# Altium PCB mag-encoder-v2.PcbDoc
Units mm, origin at the board's own origin, x right, y up, seen from the top; angles counter-clockwise.
Board outline 66.2 x 50.7 mm, 3 copper layers (Component Side, Mid-Layer 1, Bottom Layer), stack 1.937 mm thick; 34 components, 28 nets, 182 pads, 32 vias.
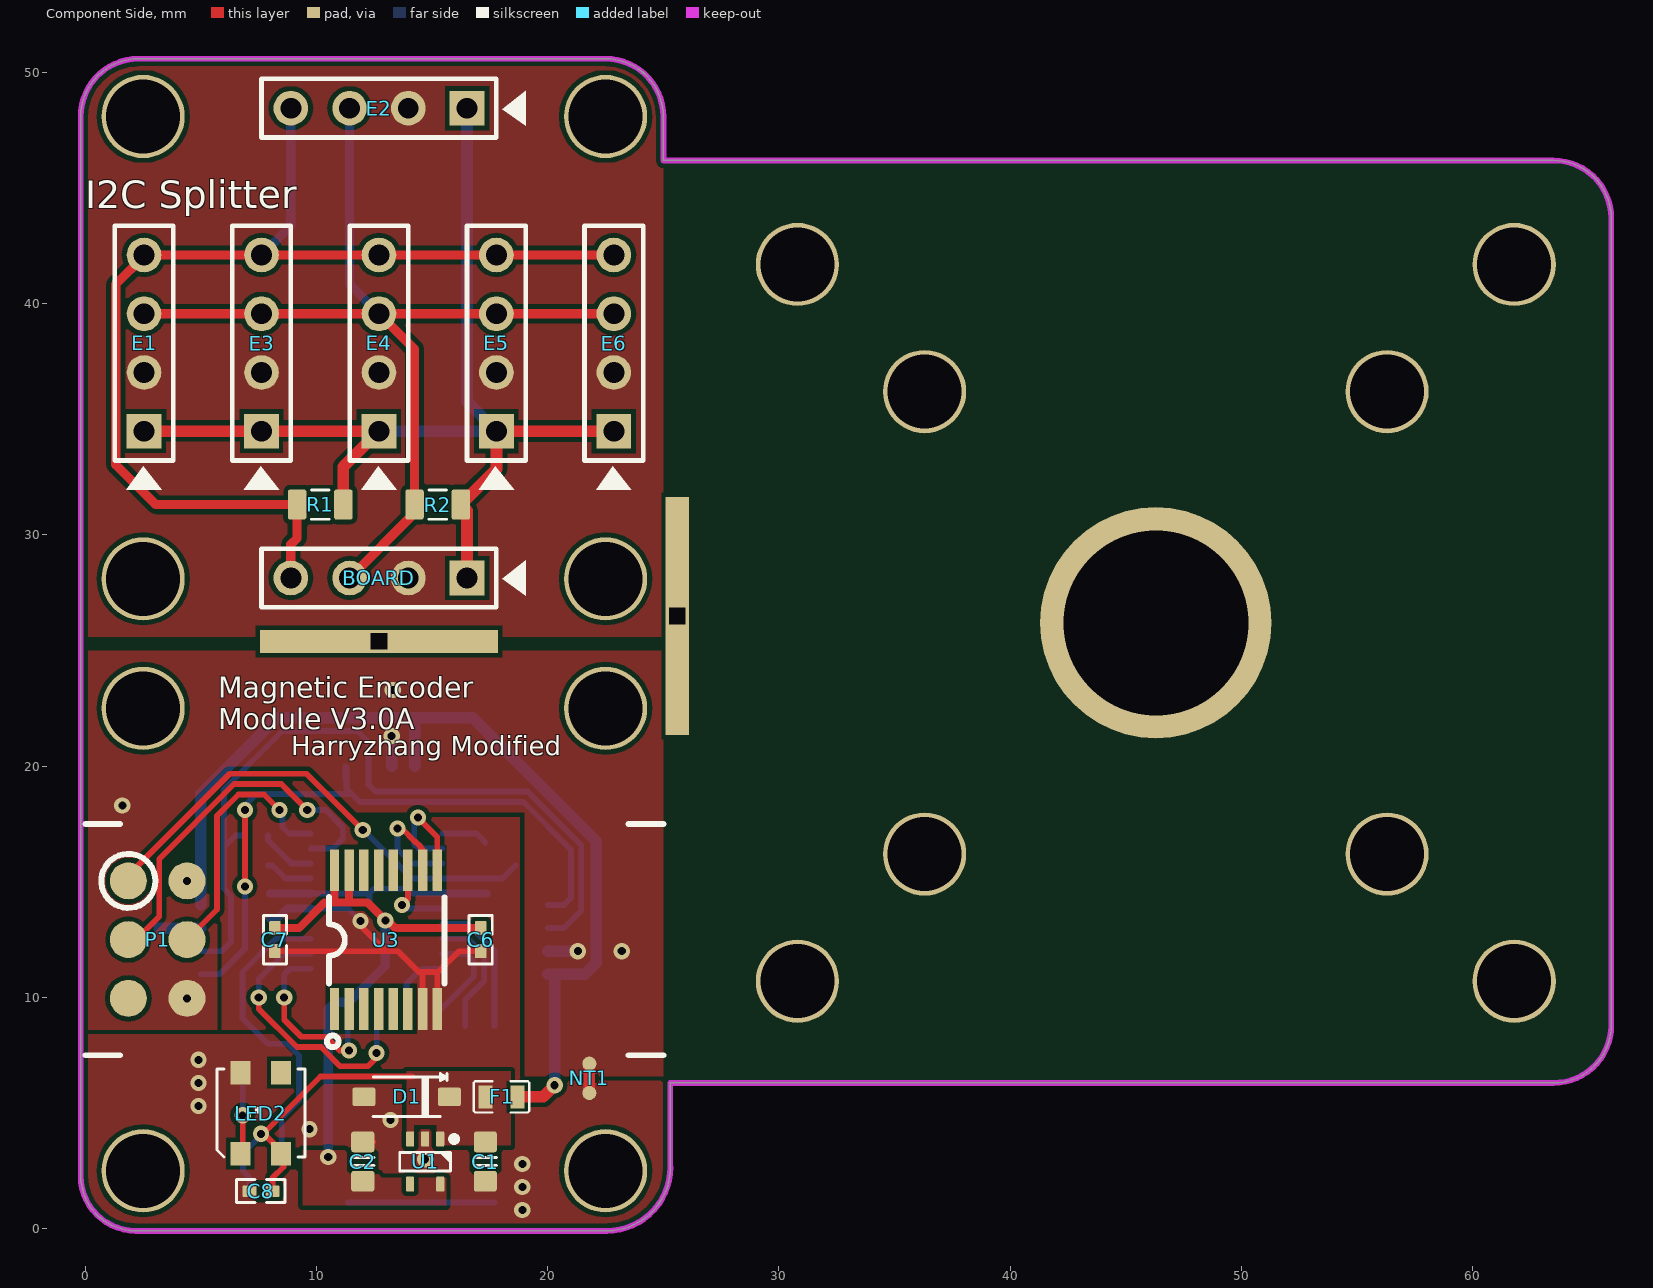
[diagram p0: Component Side view]
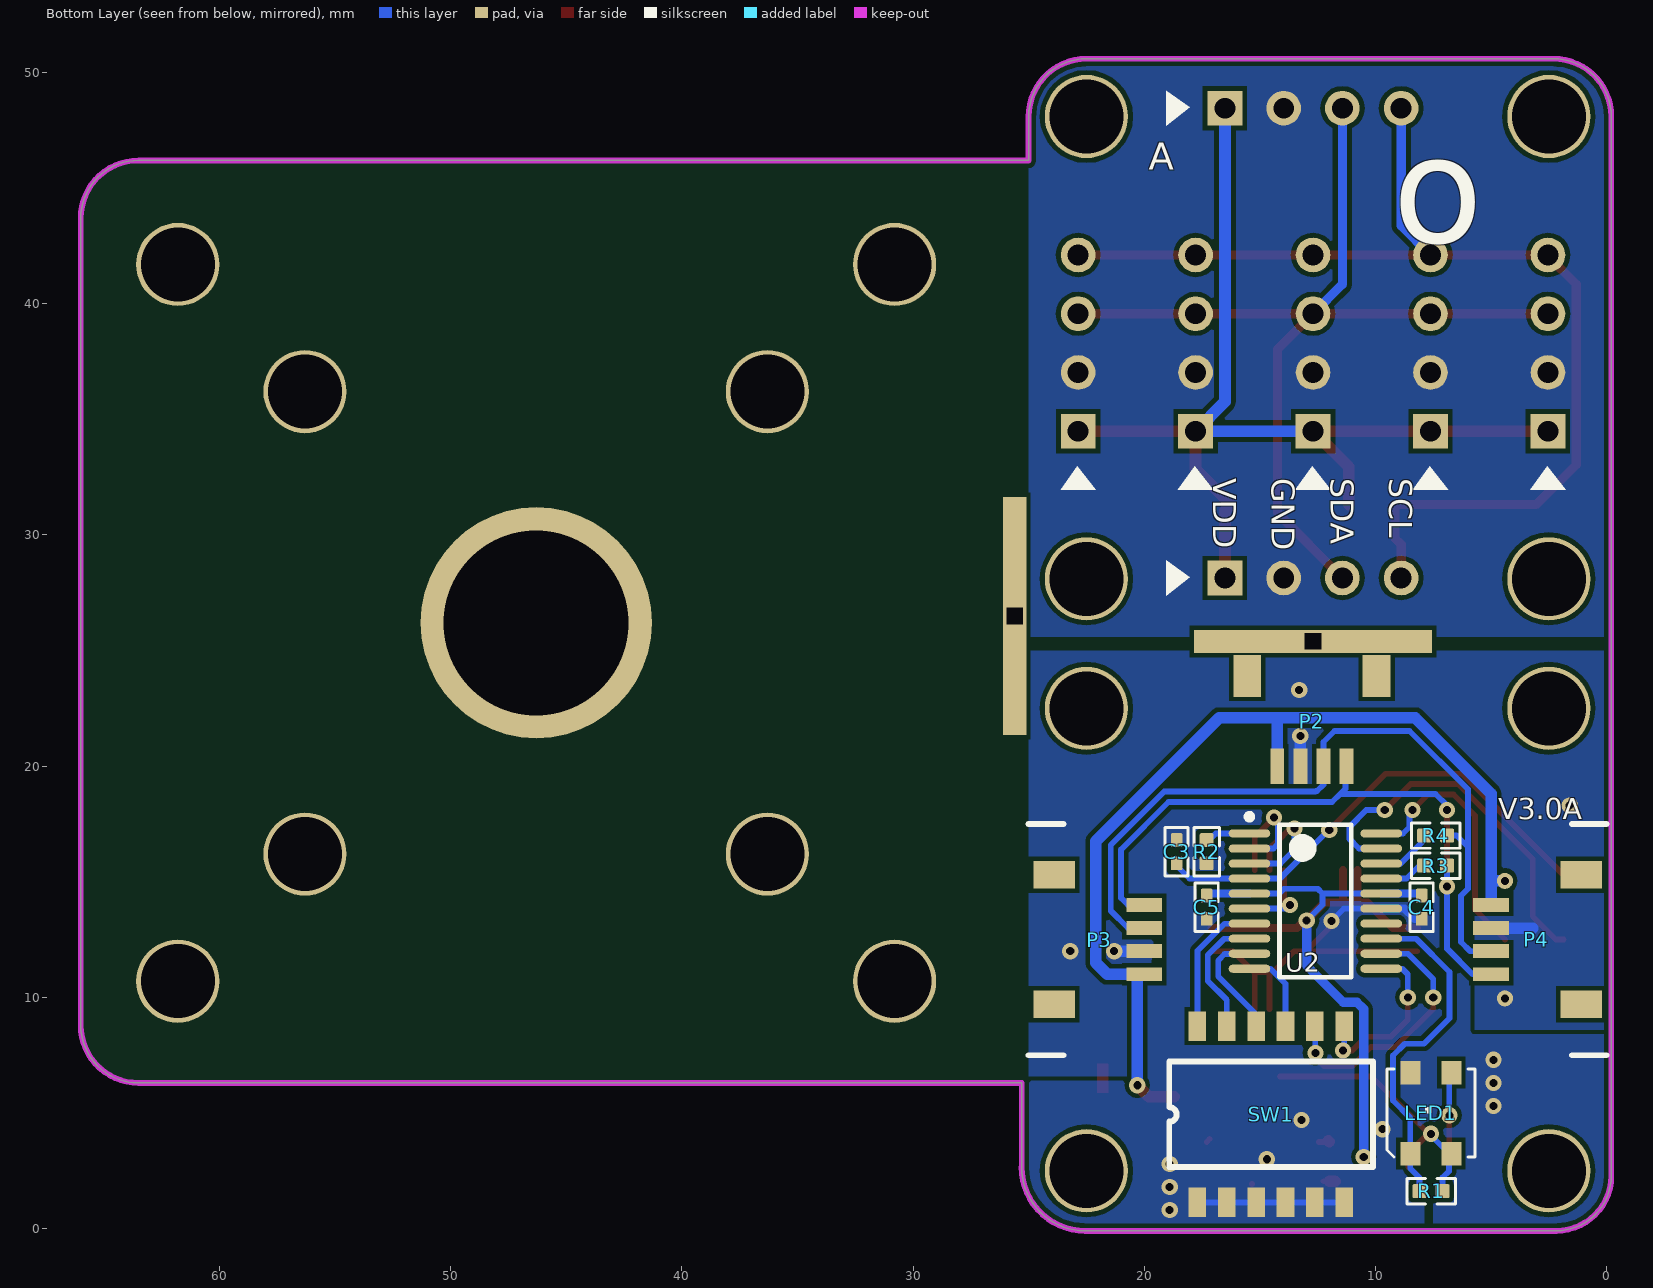
[diagram p1: Bottom Layer view, seen from below]
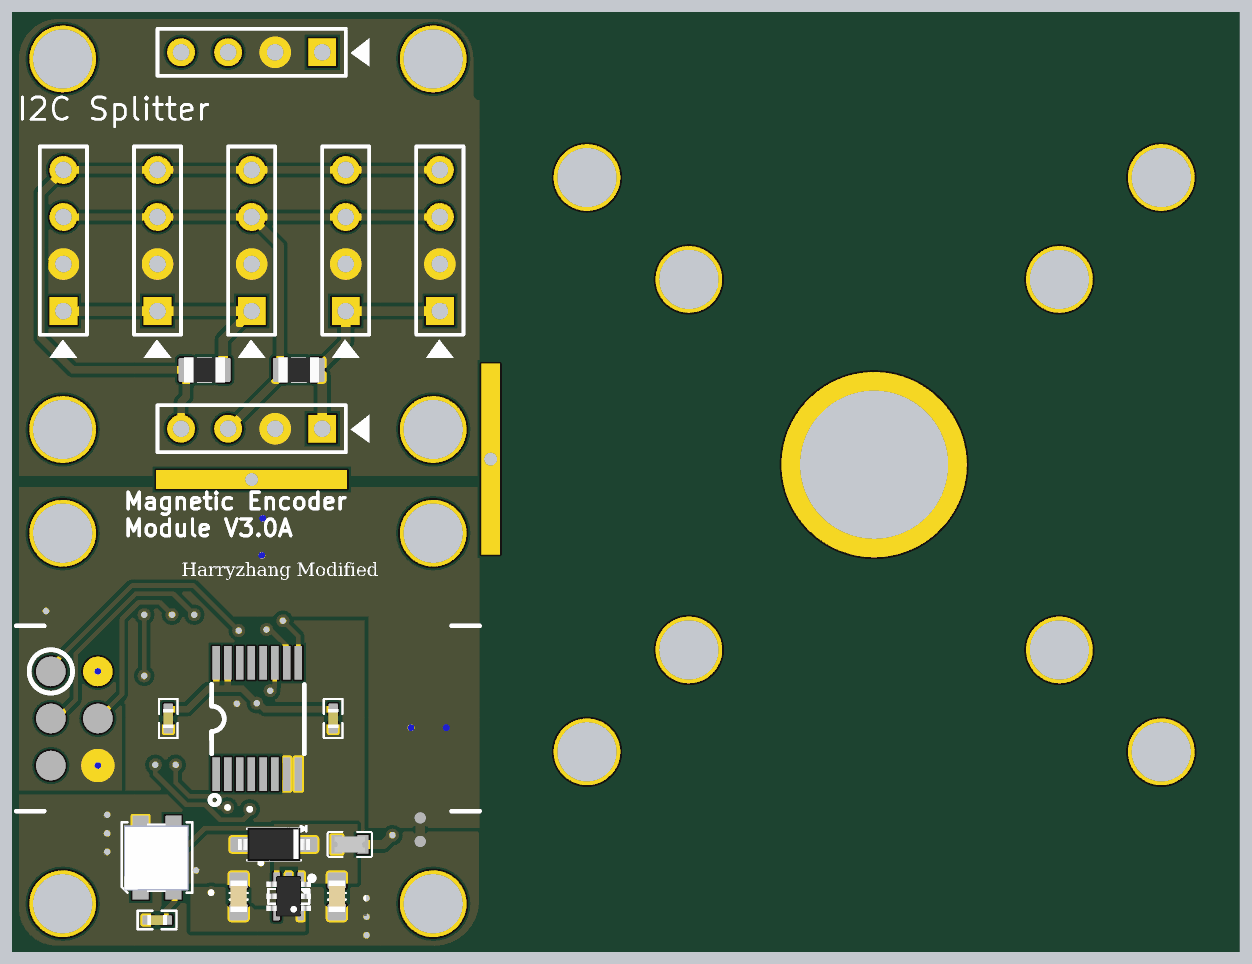
[diagram p2: 3D render of the assembled board from above, using the file's embedded part models]
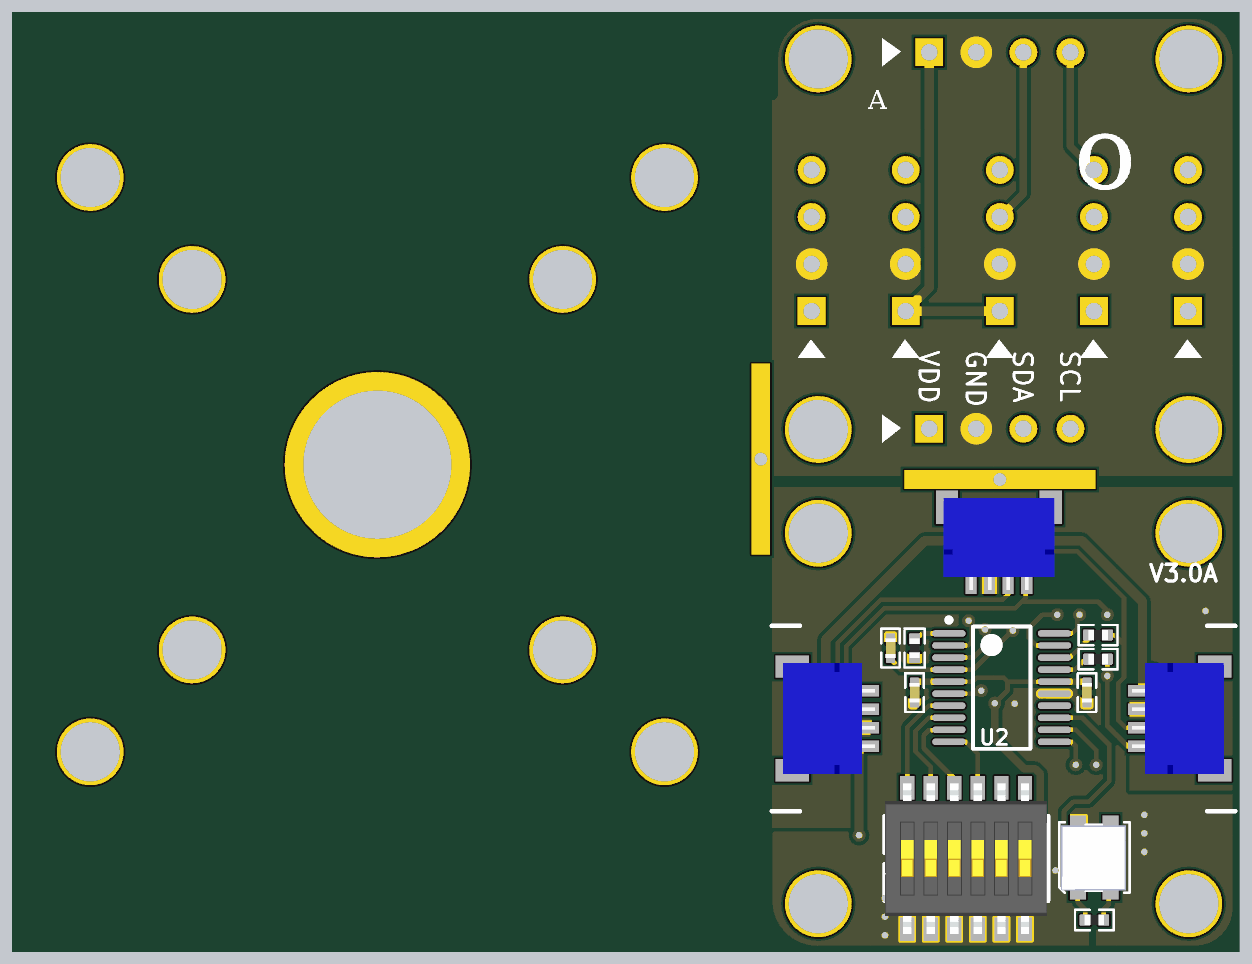
[diagram p3: 3D render of the assembled board from below, using the file's embedded part models]

## Layer stack, top to bottom
Top Solder: solder mask 0.0102, Solder Resist, Dk 3.5
Component Side: signal copper 0.0356
Dielectric 1: core 1.51, FR-4, Dk 4.2
Mid-Layer 1: signal copper 0.0356
Dielectric2: dielectric 0.32, FR-4, Dk 4.8
Bottom Layer: signal copper 0.0356
Solder Side: solder mask 0.0102, Solder Resist, Dk 3.5

## Board outline
-0.2,2.282 ccw(c2.173,2.282) 2.173,-0.091 2.173,-0.1 22.549,-0.1 ccw(c22.549,2.657) 25.306,2.657 25.3,2.663 25.3,6.3 63.5,6.3 ccw(c63.5,8.8) 66,8.8 66,43.7 ccw(c63.5,43.7) 63.5,46.2 25,46.2 25,48.1 ccw(c22.5,48.1) 22.5,50.6 2.3,50.6 ccw(c2.3,48.1) -0.2,48.1

## Design rules (kind name [scope] priority, off if disabled: settings)
Clearance [All] p1: gap=0.2 ignorepadtopadclearanceinfootprint=FALSE except(0: Arc-Hole Track-Hole SMDPad-Hole THPad-Hole Via-Hole Fill-Hole Poly-Hole Region-Hole Text-Hole)
FabricationTestPointUsage TestPointUsage [All] p1: valid=0 allowmultiple=FALSE
FabricationTestpoint Testpoint [All] p1: side=3 testpointundercomponent=TRUE minsize=1.016 maxsize=2.54 preferedsize=1.524 minholesize=0 maxholesize=1.016 preferedholesize=0.813 testpointgrid=0.025 allowsidetop=TRUE allowsidebottom=TRUE usegrid=TRUE gridtolerance=0
HoleSize [All] p1: absolutevalues=TRUE maxlimit=3.5 minlimit=0.025 maxpercent=80.000 minpercent=20.000
PlaneConnect [IsVia] p1: planeconnectstyle=Direct reliefexpansion=0.508 reliefentries=4 reliefconductorwidth=0.254 reliefairgap=0.254
PlaneConnect PlaneConnect_1 [All] p2: planeconnectstyle=Relief reliefexpansion=0.508 reliefentries=4 reliefconductorwidth=0.254 reliefairgap=0.254
PolygonConnect PolygonConnect_1 [IsVia] p1: connectstyle=Direct reliefconductorwidth=0.254 reliefentries=4 polygonreliefangle="90 Angle" airgapwidth=0.254
PolygonConnect PolygonConnect_2 [HasFootprint('NETTIE_INTERNAL2_24MIL')] p2: connectstyle=Direct reliefconductorwidth=0.254 reliefentries=4 polygonreliefangle="90 Angle" airgapwidth=0.254
PolygonConnect [All] p3: connectstyle=Direct reliefconductorwidth=0.254 reliefentries=4 polygonreliefangle="90 Angle" airgapwidth=0.254
RoutingVias [All] p1: holewidth=0.35 width=0.7 viastyle="Through Hole" minholewidth=0.35 minwidth=0.7 maxholewidth=1 maxwidth=1.4
SilkToSolderMaskClearance SilkscreenOverComponentPads [IsPad] p1: minsilkscreentomaskgap=0.254 clearancetoexposedcopper=TRUE
SolderMaskExpansion [All] p1: expansion=0.102
Width [All] p1: maxlimit=1 minlimit=0.25 preferedwidth=0.25
25 further rules are at their usual default settings.

## Classes and differential pairs
component class splitterBoard: BOARD E1 E2 E3 E4 E5 E6 R1 R2
component class mag-encoder-v2: C1 C2 C3 C4 C5 C6 C7 C8 D1 F1 LED1 LED2 NT1 P1 P2 P3 P4 R1 R2 R3 R4 SW1 U1 U2 U3

## Components (designator, comment, footprint, x,y, rotation, side; value= is the part's Value field where it differs from the comment)
BOARD "Header 4" HDR1X4 16.51,28.14 r180 top
C1 "approved sub OK" CAPC1608X90N 17.3,2.9 r270 top value=4u7
C2 "approved sub OK" CAPC1608X90N 12,2.9 r90 top value=4u7
C3 "Approved sub OK" CAPC1005X55N 18.6,16.3 r90 bottom value=100n
C4 "Approved sub OK" CAPC1005X55N 8,13.9 r270 bottom value=100n
C5 "Approved sub OK" CAPC1005X55N 17.3,13.9 r270 bottom value=100n
C6 "Approved sub OK" CAPC1005X55N 17.1,12.5 r270 top value=100n
C7 "Approved sub OK" CAPC1005X55N 8.2,12.5 r270 top value=100n
C8 "Approved sub OK" CAPC1005X55N 7.595,1.62 r180 top value=100n
D1 "Approved sub OK" SOD123 13.9,5.7 r180 top value=5.6V
E1 "Header 4" HDR1X4 2.54,34.49 r90 top
E2 "Header 4" HDR1X4 16.51,48.46 r180 top
E3 "Header 4" HDR1X4 7.62,34.49 r90 top
E4 "Header 4" HDR1X4 12.7,34.49 r90 top
E5 "Header 4" HDR1X4 17.78,34.49 r90 top
E6 "Header 4" HDR1X4 22.86,34.49 r90 top
F1 "Approved sub OK" "PTC Fuse1608-0603" 18,5.7 r180 top value=250mA
LED1 "SK6812-Mini" SK6812 7.595,4.995 r270 bottom
LED2 "SK6812-Mini" SK6812 7.595,4.995 r270 top
NT1 "Net Tie" NETTIE_INTERNAL2_24MIL 21.8,6.5 r270 top net-tie
P1 "ISP" "ICSP Pads - SMD" 1.86,15.04 r0 top
P2 "JST-SH 4P" SM04B-SRSS-TB 14.25,20 r90 bottom locked
P3 "JST-SH 4P" SM04B-SRSS-TB 20,11 r0 bottom locked
P4 "JST-SH 4P" SM04B-SRSS-TB 5,14 r180 bottom locked
R1 "RES_EMPTY_0805" RESC2012X70N 10.16,31.315 r180 top value=N/A
R1 "Approved sub OK" RESC1005X40N 7.595,1.62 r0 bottom value=2K2
R2 "RES_EMPTY_0805" RESC2012X70N 15.24,31.315 r180 top value=N/A
R2 "Approved sub OK" RESC1005X40N 17.3,16.3 r270 bottom value=2K2
R3 "Approved sub OK" RESC1005X40N 7.4,15.7 r0 bottom value=330R
R4 "Approved sub OK" RESC1005X40N 7.4,17 r0 bottom value=330R
SW1 "Approved sub OK" "DIPSW SMD 6 Way" 17.7,1.135 r270 bottom locked
U1 "MIC5365-3.3YC5" SC70-5 14.7,2.9 r270 top
U2 "STM32F030F4P6" STM-TSSOP20_N 12.6,14.165 r180 bottom locked
U3 "AMS AS-5040" SSOP-16_L4.9-W3.9-P0.64-LS6.0-BL 13,12.5 r0 top locked

## Footprints (in the part's own frame and the unit in brackets; to place one, negate y for a bottom-side part, rotate by r counter-clockwise, add the part's x,y. Pads: shape width x height; smd on the part's side, far side on the other; paste and mask are expansions set on the pad)
CAPC1005X55N [mm] "Chip Capacitor, Body 1.0x0.5mm, EIA 0402, IPC Medium Density"
  round 0.2 on Mech15: 0(0,0)
  rrect20% 0.6x0.5 smd: 1(-0.5,0) 2(0.5,0)
  Component Side pour cut-out: -0.325,0.375 -0.2,0.5 0.2,0.5 0.325,0.375 0.325,-0.375 0.2,-0.5 -0.2,-0.5 -0.325,-0.375
  silkscreen extent -1.05,-0.5 1.05,0.5, body extent -0.52,-0.27 0.53,0.28, height 0.55
CAPC1608X90N [mm] "Chip Capacitor, Body 1.6x0.8mm, EIA 0603, IPC Medium Density"
  round 0.254 on Mech15: 0(0,0)
  rrect25% 0.9x1 smd: 1(-0.85,0) 2(0.85,0)
  Component Side pour cut-out: -0.6,0.5 -0.4,0.7 0.4,0.7 0.6,0.5 0.6,-0.5 0.4,-0.7 -0.4,-0.7 -0.6,-0.5
  silkscreen extent -0.18,-0.48 0.18,0.48, body extent -0.85,-0.45 0.85,0.45, height 0.89
"DIPSW SMD 6 Way" [mil]
  rect 50x30 smd: 1(0,0) 2(0,50) 3(0,100) 4(0,150) 5(0,200) 6(0,250) 7(-300,250) 8(-300,200) 9(-300,150) 10(-300,100) 11(-300,50) 12(-300,0)
  silkscreen extent -240,-48 -60,299, body extent -310,-47 10,297, height 93
HDR1X4 [mm] "Connector; Header; 4 Position"
  rect 1.5x1.5 hole 0.9: 1(0,0)
  round 1.5 hole 0.9: 2(2.54,0) 3(5.08,0) 4(7.62,0)
  silkscreen extent -1.27,-1.27 8.89,1.27
"ICSP Pads - SMD" [mm]
  round 1.6 smd: 0(0,0) 2(0,-2.54) 3(2.54,-2.54) 4(0,-5.08)
  round 1.6 / inner round 1.6 / far side round 0.7 hole 0.35: 1(2.54,0) 5(2.54,-5.08)
  silkscreen extent -1.17,-1.17 1.17,1.17
NETTIE_INTERNAL2_24MIL [mil]
  round 24 smd: 1(-25,0) 2(25,0)
  Component Side region: -25,-9.99 0,-9.99 0,10.01 -25,10.01
  Component Side region: 0,-9.99 25,-9.99 25,10.01 0,10.01
"PTC Fuse1608-0603" [mm]
  rect 0.6x1 smd: 1(-0.7,0) 2(0.7,0)
  silkscreen extent -1.2,-0.67 1.2,0.67, body extent -0.82,-0.42 0.83,0.43, height 0.48
RESC1005X40N [mm] "Chip Resistor, Body 1.0x0.5mm, EIA 0402, IPC Medium Density"
  round 0.2 on Mech15: 0(0,0)
  rrect20% 0.6x0.6 smd: 1(-0.5,0) 2(0.5,0)
  Component Side pour cut-out: -0.325,0.375 -0.2,0.5 0.2,0.5 0.325,0.375 0.325,-0.375 0.2,-0.5 -0.2,-0.5 -0.325,-0.375
  silkscreen extent -1.05,-0.55 1.05,0.55, body extent -0.52,-0.27 0.53,0.28, height 0.4
RESC2012X70N [mm] "Chip Resistor, Body 2.0x1.2mm, EIA 0805, IPC Medium Density"
  round 0.254 on Mech15: 0(0,0)
  rrect25% 0.8x1.3 smd: 1(-1,0) 2(1,0)
  Component Side pour cut-out: -0.725,0.65 -0.525,0.85 0.525,0.85 0.725,0.65 0.725,-0.65 0.525,-0.85 -0.525,-0.85 -0.725,-0.65
  silkscreen extent -0.38,-0.64 0.38,0.64, body extent -1.1,-0.67 1.1,0.68, height 0.69
SC70-5 [mm] "SC70-5; SOT-353"
  round 0.254 on Mech15: 0(0,0)
  rrect25% 0.65x0.35 smd: 1(-0.975,0.65) 2(-0.975,0) 3(-0.975,-0.65) 4(0.975,-0.65) 5(0.975,0.65)
  silkscreen extent -1.1,-1.1 0.4,1.38, body extent -1.2,-1.1 1.2,1.1, height 1.1
SK6812 [mil]
  rect 40x34 smd: 1(68.9,-35) 2(68.9,34.45) 3(-69,34.45) 4(-69,-35)
  silkscreen extent -75,-75 75,75, body extent -72,-71 74,67, height 47
SM04B-SRSS-TB [mm]
  rect 1.55x0.6 smd: 0(0,0) 1(0,-1) 2(0,-2) 3(0,-3)
  rect 1.8x1.2 smd: ""(3.9,-4.3) ""(3.9,1.3)
  body extent -0.55,-4.5 4.4,1.5, height 2.96
SOD123 [mm] "SOD-123; 2 Leads; Body 2.7 x 1.6 mm, (LxW)"
  round 0.508 on Mech15: 0(0,0)
  rrect25% 1x0.8 smd: A(1.85,0) K(-1.85,0)
  silkscreen extent -1.75,-1 1.45,0.85, body extent -1.95,-0.9 1.95,0.9, height 1.18
SSOP-16_L4.9-W3.9-P0.64-LS6.0-BL [mil]
  rect 16x71 smd: 1(-87.5,-118.11) 2(-62.5,-118.11) 3(-37.5,-118.11) 4(-12.5,-118.11) 5(12.5,-118.11) 6(37.5,-118.11) 7(62.5,-118.11) 8(87.5,-118.11) 9(87.5,118.11) 10(62.5,118.11) 11(37.5,118.11) 12(12.5,118.11) 13(-12.5,118.11) 14(-37.5,118.11) 15(-62.5,118.11) 16(-87.5,118.11)
  silkscreen extent -101,-183 100,73
STM-TSSOP20_N [mm] "SOP, 20-Leads, Body 6.6x4.5mm, Pitch 0.65mm, IPC Medium Density"
  oval 1.8x0.35 smd: 1(-2.85,2.925) 2(-2.85,2.275) 3(-2.85,1.625) 4(-2.85,0.975) 5(-2.85,0.325) 6(-2.85,-0.325) 7(-2.85,-0.975) 8(-2.85,-1.625) 9(-2.85,-2.275) 10(-2.85,-2.925) 11(2.85,-2.925) 12(2.85,-2.275) 13(2.85,-1.625) 14(2.85,-0.975) 15(2.85,-0.325) 16(2.85,0.325) 17(2.85,0.975) 18(2.85,1.625) 19(2.85,2.275) 20(2.85,2.925)
  silkscreen extent -2.98,-3.3 1.55,3.77, body extent -2.25,-3.3 2.25,3.3, height 1.2

## Part data
BOARD E1 E2 E3 E4 E5 E6: "Header, 4-Pin", LatestRevisionDate=17-Jul-2002, LatestRevisionNote="Re-released for DXP Platform.", Publisher="Altium Limited"
C1 C2: library part CAPC_100n_0603_X7R_50V_10%, "Capacitor SMD Cer 4.7uF 10% 16V X5R 0603", Manufacturer 1="Samsung Electro-Mechanics America, Inc.", Manufacturer 2="TDK Corporation", Manufacturer Part Number 1=CL10A475KO8NNNC, Manufacturer Part Number 2=C1608X7R1H104K, Package / Case="0603 (1608 Metric)", Ratings="16V; X5R", Supplier Part Number 1=1276-2087-1-ND, Tolerance=±10%, ComponentLink1Description=http://www.avx.com/docs/Catalogs/cx7r.pdf, ComponentLink1URL=http://www.avx.com/docs/Catalogs/cx7r.pdf, ComponentLink2Description=http://product.tdk.com/capacitor/mlcc/en/documents/mlcc_commercial_general_en.pdf, ComponentLink2URL=http://product.tdk.com/capacitor/mlcc/en/documents/mlcc_commercial_general_en.pdf, Material=ceramic, SCDType=spec, Supplier 1=Digi-Key, Supplier 2=Digi-Key, Supplier Part Number 2=1276-2087-1-ND
C3 C4 C5 C6 C7 C8: library part CAPC_100n_0402_X5R_16V_10%, "Capacitor SMD Cer 100nF 10% 16V X5R 0402", Manufacturer 1="AVX Corporation", Manufacturer 2=Yageo, Manufacturer Part Number 1=0402YD104KAT2A, Manufacturer Part Number 2=CC0402KRX5R7BB104, Operating Temperature="-55°C ~ 125?", Package / Case="0402 (1005 Metric)", Ratings="16V; X5R", Supplier Part Number 1=478-1126-1-ND, Tolerance=±10%, ComponentLink1Description=http://www.avx.com/docs/Catalogs/cx5r.pdf, ComponentLink1URL=http://www.avx.com/docs/Catalogs/cx5r.pdf, ComponentLink2Description=http://www.yageo.com/documents/recent/UPY-GPHC_X5R_4V-to-50V_12.pdf, ComponentLink2URL=http://www.yageo.com/documents/recent/UPY-GPHC_X5R_4V-to-50V_12.pdf, SCDType=spec, Size / Dimension="0.039\" L x 0.020\" W (1.00mm x 0.50mm)", Supplier 1=Digi-Key, Supplier 2=Digi-Key, Supplier Part Number 2=311-1347-1-ND
D1: library part DIODE_ZENER_5.6V_500mW, "Diode Zener SMD 5.6V 0.5W SOD-123 BZT52C5V6", Package / Case=SOD-123, Ratings="5.6V; 0.5W; Vf=900mV @ 10mA", Supplier Part Number 1=BZT52C5V6-FDICT-ND, Tolerance=±7%, Diode Type=Zener, Material=Si, SCDType=source, Supplier 1=Digi-Key
F1: library part "Fuse - 15V 100mA Hold 250mA Trip PTC SMD 0603", "Fuse - 15V 100mA Hold 250mA Trip PTC SMD 0603", Package / Case="0603 (1608 metric)", Ratings="160mA; 63VDC; slow-blow", Supplier Part Number 1=507-1818-1-ND, SCDType=spec, Supplier 1=Digi-Key
LED1 LED2: library part WS2812B3535, "RGB Smart LED WS2812 / SK6812 Mini 3535", Manufacturer 1="DONGGUANG OPSCO OPTOELECTRONICS CO., LTD", Manufacturer Part Number 1=SK6812MINI
NT1: library part JUMP_NETTIE
P1: library part "ISP Header"
P2 P3 P4: library part SM04B-SRSS-TB, "JST SH 4P Connector", Supplier Part Number 1=455-1804-1-ND, Supplier 1=Digi-Key
R1 R2: "Resistor, 0805 SMD, Empty footprint", Package / Case="0805 (2012 metric)"
R1 R2: library part RES_2K2_0402_5%, "Resistor SMD chip 2.2k Ohm 0.063W 5% 0402", Manufacturer 1="Vishay Dale", Manufacturer 2=Yageo, Manufacturer Part Number 1=CRCW04022K20JNED, Manufacturer Part Number 2=RC0402JR-072K2L, Package / Case="0402 (1005 metric)", Ratings="1/16 W", Supplier Part Number 1=541-2.2KJCT-ND, Tolerance=±5%, ComponentLink1Description=http://www.vishay.com/doc?20035, ComponentLink1URL=http://www.vishay.com/doc?20035, ComponentLink2Description=http://www.yageo.com/documents/recent/PYu-RC0402_51_RoHS_L_6.pdf, ComponentLink2URL=http://www.yageo.com/documents/recent/PYu-RC0402_51_RoHS_L_6.pdf, Material="Thick Film", SCDType=spec, Supplier 1=Digi-Key, Supplier 2=Digi-Key, Supplier Part Number 2=311-2.2KJRCT-ND
R3 R4: library part RES_330R_0402_5%, "Resistor SMD chip 330 Ohm 0.063W 5% 0402", Manufacturer 1=Yageo, Manufacturer Part Number 1=RC0402JR-07330RL, Package / Case="0402 (1005 Metric)", Ratings="1/16 W", Supplier Part Number 1=311-330JRCT-ND, Tolerance=±5%, ComponentLink1Description=http://www.yageo.com/documents/recent/PYu-RC0402_51_RoHS_L_6.pdf, ComponentLink1URL=http://www.yageo.com/documents/recent/PYu-RC0402_51_RoHS_L_6.pdf, SCDType=spec, Supplier 1=Digi-Key
SW1: library part "SW DIP-6", "SMD DIP Switch 1.27mm Pitch 6 Position", Supplier Part Number 1=450-1950-1-ND, Published=24-Mar-1999, Publisher="Altium Limited", Revision="July-2002: Re-released for DXP Platform.", Supplier 1=Digi-Key
U1: library part "Regulator - MIC5365 3.3V Linear Regulator", "3.3V LDO Regulator", Supplier Part Number 1=576-3193-1-ND, Supplier 1=Digi-Key
U2: "ARM Cortex-M0 32-bit MCU, 16 KB Flash, 4 KB Internal RAM, 15 I/Os, 20-pin TSSOP, -40 to 85 degC, Tube", I/Os (High Current)=15, Operating Frequency(F) (Processor speed) (MHz)=48, Supplier Part Number 1=497-14044-5-ND, Supply Voltage(Vcc) min (V)=2.4, ComponentLink1Description="Manufacturer URL", ComponentLink1URL=http://www.st.com/web/en/home.html, ComponentLink2Description=Datasheet, ComponentLink2URL=http://www.st.com/st-web-ui/static/active/en/resource/technical/document/datasheet/DM00088500.pdf, ComponentLink3Description="Package Specification", ComponentLink3URL=http://www.st.com/st-web-ui/static/active/en/resource/technical/document/datasheet/DM00065136.pdf, Core="ARM Cortex-M0", DatasheetVersion="Rev. 1", FLASH Size (Prog) (kB)=16, Internal RAM Size (kB)=4, Mounting Technology="Surface Mount", PackageDescription="20-Pin Thin Shrink Small Outline Package, 6.5 x 4.4 mm Body, 0.65 mm Pitch", PackageReference=TSSOP20, PackageVersion="Rev. 1, 11/2012", Packing=Tube, PartNumber=STM32F030F4P6, Supplier 1=Digi-Key, Supplier 2=Newark, Supplier 3=Mouser, Supplier Part Number 2=06X3648, Supplier Part Number 3=511-STM32F030F4P6
U3: "AMS 10-bit Linear Magnetic Encoder IC", Supplier Part Number 1=AS5311-ATST-500CT-ND, Supplier 1=Digi-Key

## Free pads (board coordinates)
  round 3.6 hole 3.2: 0(2.5,2.5) 0(2.5,22.5) 0(2.5,28.1) 0(2.5,48.1) 0(22.5,2.5) 0(22.5,22.5) 0(22.5,28.1) 0(22.5,48.1) 0(30.8,10.7) 0(30.8,41.7) 0(36.3,16.2) 0(36.3,36.2) 0(56.3,16.2) 0(56.3,36.2) 0(61.8,10.7) 0(61.8,41.7)
  round 10 hole 8: 0(46.3,26.2)
  rect 10.3x1 hole 0.7 square: 2(12.7,25.4)
  rect 1x10.3 hole 0.7 square: 2(25.6,26.5)

## Via types
v1: diameter 0.7, hole 0.35, Component Side to Bottom Layer, tented both sides, 32 vias

## Nets (pads, with @x,y where several pads share a name; then routed paths per layer and width w, separated by ;. In a path a pad name is that pad's centre, name@x,y a point inside that pad or via, vN(x,y) a via of type N, cw(c..) or ccw(c..) an arc to the next point about the centre after c; other vN are vias at no path point)
3V3: C2.1 C4.1 C5.1 C6.1 C7.1 U1.5 U2.5 U2.16 U3.15 U3.16 | length 35.5
  Component Side w0.25: C2.1 C2.1@12.25,2.05 ; U1.5@15.339,1.925 U1.5
  Component Side w0.35: C7.1 9.25,13 10.35,14.1 10.6,14.1 11.1,14.1 11.412,14.1 ; 10.777,14.278 U3.16 ; U3.15 11.412,14.1 ; v1(12.975,13.325) 12.2,14.1 11.412,14.1 ; v1@13.075,13.325 13.4,13 C6.1
  Component Side w0.5: v1@10.508,3.038 v1(10.508,3.1) ; C2.1@11.75,2.05 C2.1
  Bottom Layer w0.25: U2.16 12.29,14.49 ; v1(12.975,13.325) 12.4,13.9 12.29,14.01 12.29,14.49 ; U2.5 14.165,14.49 13.955,14.7 12.5,14.7 12.29,14.49 ; C5.1@17.36,14.49 C5.1@17.4,14.45
  Bottom Layer w0.35: C4.1@8,14.49 U2.16 ; U2.5 C5.1@17.36,14.49
  Bottom Layer w0.4: v1(10.508,3.1) 10.508,9.495 10.803,9.79 11.39,9.79 12.975,11.375 v1(12.975,13.325)
ADR1: SW1.7 U2.11 | length 8
  Component Side w0.25: v1(8.6,10) 8.6,9.037 9.337,8.3 10.4,8.3 11,7.7 v1(11.4,7.7)
  Bottom Layer w0.25: v1(8.6,10) 8.6,11 8.84,11.24 U2.11 ; SW1.7 v1@11.35,7.65 ; v1(11.4,7.7) v1@11.35,7.65 ; v1@11.35,7.65 11.3,7.6 11.35,7.55 v1@11.35,7.65
ADR2: SW1.8 U2.12 | length 11.7
  Component Side w0.25: v1(7.5,10) 7.5,9.5 9.151,7.85 10.196,7.85 11.02,7.025 11.12,7.025 12.225,7.025 12.55,7.35 v1@12.55,7.65
  Bottom Layer w0.25: v1(7.5,10) 7.5,10.8 8.59,11.89 U2.12 ; v1(12.6,7.6) 12.6,8.735 SW1.8
ADR3: SW1.9 U2.10 | length 3.7
  Bottom Layer w0.25: SW1.9 13.89,10.59 14.54,11.24 U2.10
BOOT0: R2.1@17.3,16.8 U2.1 | length 2
  Bottom Layer w0.25: U2.1 16.91,17.09 R2.1@17.3,16.7
CLK: U2.3 U3.10 | length 5.5
  Component Side w0.25: v1(13.5,17.3) 13.7,17.3 14.273,16.727 14.29,16.727 14.481,16.536 14.481,16.519 14.588,16.412 U3.10
  Bottom Layer w0.25: v1(13.5,17.3) 13.5,16.4 14.11,15.79 U2.3
CSN: U2.6 U3.11 | length 3.6
  Component Side w0.25: v1@13.58,14.02 13.6,14 v1(13.7,14) 13.953,14.253 U3.11
  Bottom Layer w0.25: v1(13.7,14) 13.7,13.98 13.84,13.84 U2.6
DIO: U2.2 U3.9 | length 5.3
  Component Side w0.25: v1@14.525,17.775 v1(14.385,17.775) 15.223,16.937 U3.9
  Bottom Layer w0.25: v1(14.385,17.775) 14.225,17.615 14.225,16.625 14.41,16.44 U2.2
DISABLE: SW1.12 U2.7 | length 6
  Bottom Layer w0.25: U2.7 16.53,13.19 17.7,12.02 SW1.12
GND: C1.2 C2.2 C3.2 C4.2 C5.2 C6.2 C7.2 C8.2 D1.A LED1.4 LED2.4 NT1.2 R2.2@17.3,15.8 SW1.1 SW1.2 SW1.3 SW1.4 SW1.5 SW1.6 U1.2 U2.15 U3.7 U3.8 | length 25.8
  Component Side w0.25: C7.2 13,12 ; v1(11.9,13.3) 11.9,13.1 13,12 ; C2.2 C2.2@12.45,3.75 ; U3.7 14.588,10.988 14.7,11.1 ; U3.8 15.223,11.066 15.256,11.1 ; C6.2 16.156,12 15.256,11.1 ; 13,12 13.519,12 14.419,11.1 14.7,11.1 ; 14.7,11.1 15.256,11.1
  Component Side w0.5: C2.2 C2.2@12.05,3.8
  Bottom Layer w0.25: U2.15 11.36,13.84 v1(11.9,13.3) ; SW1.6 SW1.5 SW1.4 SW1.3 SW1.2 SW1.1
  Bottom Layer w0.35: C4.2 8.3,13.4 8.74,13.84 U2.15
  other v1: 18.9,0.8 18.9,1.8 18.9,2.8 14.7,3 9.7,4.3 13.2,4.7 4.9,5.3 4.9,6.3 4.9,7.3
GND_H: BOARD.2 E1.2 E2.2 E3.2 E4.2 E5.2 E6.2
NetLED1_3: LED1.3 LED2.1 | length 3.5
  Component Side w0.25: LED2.1@6.806,3.245 v1(6.806,4.9)
  Bottom Layer w0.25: v1(6.806,4.9) 6.806,6.734 LED1.3@6.82,6.748
NetR3_2: R3.2 U2.17 | length 2.1
  Bottom Layer w0.25: R3.2 8.1,15.7 8.66,15.14 U2.17
NetR4_2: R4.2 U2.18 | length 2.5
  Bottom Layer w0.25: R4.2 7.9,16.8 8.91,15.79 U2.18
NRST: C3.1 P1.0 U2.4 | length 20.9
  Component Side w0.25: P1.0 1.86,15.287 6.248,19.675 9.57,19.675 v1(12,17.245)
  Bottom Layer w0.25: v1(12,17.245) 12.018,17.245 14.114,15.15 14.141,15.15 14.151,15.14 U2.4 18.04,15.14 C3.1@18.6,15.7
OPT1: SW1.10 U2.9 | length 5
  Bottom Layer w0.25: SW1.10 15.16,9.26 16.8,10.9 16.8,11.6 16.525,11.875 15.465,11.875 U2.9
OPT2: SW1.11 U2.8 | length 5.5
  Bottom Layer w0.25: U2.8 16.543,12.54 17.25,11.833 17.25,10.714 16.43,9.894 SW1.11
PWR_GND: NT1.1 P1.5 P2.1 P3.1 P4.1 | length 4.3
  Bottom Layer w0.5: 3.2,13 P4.1 ; P2.1 v1@13.25,21.25 ; P3.1 v1@21.25,12
  other v1: 21.3,12 23.2,12 1.6,18.3 13.25,21.3 13.3,23.3
SCL: P2.3 P3.3 P4.3 R3.1 | length 29.8
  Component Side w0.25: v1(6.9,14.8) v1(6.9,18.1)
  Bottom Layer w0.25: P4.3 5.8,11 6.9,12.1 v1(6.9,14.8) R3.1 ; v1(6.9,18.1) 6.9,18.3 7.4,18.8 11.525,18.8 ; P2.3@11.25,19.465 P2.3 11.3,19.95 11.3,19.025 11.525,18.8 ; P3.3 20.7,14 21,14.3 21,16.4 18.95,18.45 11.875,18.45 11.525,18.8
SCL_H: BOARD.4 E1.4 E2.4 E3.4 E4.4 E5.4 E6.4 R1.2@9.16,31.315 | length 48.6
  Component Side w0.4: BOARD.4 8.89,29.588 9.16,29.858 9.16,31.315 3.048,31.315 1.321,33.042 1.321,40.84 2.54,42.059 E1.4 E3.4 E4.4 E5.4 E6.4
  Bottom Layer w0.4: E3.4 8.89,43.38 E2.4
SDA: P2.2 P3.2 P4.2 R4.1 | length 33.5
  Bottom Layer w0.25: P4.2 5.9,12 6.3,12.4 6.3,14.4 6,14.7 6,16.5 ; R4.1 6.5,17 6,16.5 ; P3.2 20.7,13 21.45,13.75 21.45,16.586 19.136,18.9 12.591,18.9 12.566,18.925 12.525,18.925 12.25,19.2 P2.2 12.25,21.05 11.775,21.525 8.525,21.525 6,19 6,16.5
SDA_H: BOARD.3 E1.3 E2.3 E3.3 E4.3 E5.3 E6.3 R2.2@14.24,31.315 | length 43
  Component Side w0.4: E1.3 E3.3 E4.3 ; BOARD.3 14.24,30.95 14.24,31.315 14.24,38.03 E4.3 ; E6.3 E5.3 E4.3
  Bottom Layer w0.4: E2.3 11.43,40.84 E4.3
SWCLK: P1.3 U2.20 | length 11.4
  Component Side w0.25: P1.3 5.7,13.8 5.7,17.855 6.62,18.775 7.725,18.775 v1(8.4,18.1)
  Bottom Layer w0.25: v1(8.4,18.1) 8.525,17.975 8.525,17.375 8.81,17.09 U2.20
SWDIO: P1.2 U2.19 | length 16.4
  Component Side w0.25: P1.2 2.2,12.5 3.2,13.5 3.2,15.991 6.434,19.225 8.475,19.225 v1(9.6,18.1)
  Bottom Layer w0.25: v1(9.6,18.1) 10.4,18.1 11.137,17.363 11.137,16.863 10.715,16.44 U2.19
VDD: C1.1 C8.1 D1.K F1.2 LED1.2 LED2.2 R1.1@7.095,1.62 U1.1 U1.3 | length 14.2
  Component Side w0.25: v1(7.6,4.1) v1@7.6,4 ; C8.1 8.095,2.195 8.57,2.67 8.57,3.245 7.8,4.015 7.8,4.1 7.6,3.9 v1@7.6,4 ; 14.125,6.575 10.175,6.575 v1@7.6,4 ; C1.1@17.175,3.875 C1.1
  Bottom Layer w0.25: R1.1@7.095,1.62 7.095,2.205 6.82,2.48 6.82,3.245 7.6,4.025 v1(7.6,4.1)
VDD_H: BOARD.1 E1.1 E2.1 E3.1 E4.1 E5.1 E6.1 R1.1@11.16,31.315 R2.1@16.24,31.315 | length 45.7
  Component Side w0.508: E1.1 E3.1 E4.1 11.16,32.95 R1.1@11.16,31.315 ; BOARD.1 16.51,31.045 16.24,31.315 17.78,32.855 E5.1 E6.1
  Bottom Layer w0.508: E4.1 E5.1 16.51,35.76 E2.1
VIN: F1.1 P1.1 P2.0 P3.0 P4.0 | length 42.4
  Component Side w0.5: F1.1 19.8,5.7 v1(20.3,6.2)
  Bottom Layer w0.5: P1.1 4.96,15.04 5,15 ; P4.0 5,15 ; P2.0 14.25,22.05 14.3,22.1 ; P3.0 P3.0@20.3,11 ; v1(20.3,6.2) P3.0@20.3,11 ; 5,15 5,18.813 8.287,22.1 14.3,22.1 ; 14.3,22.1 16.75,22.1 22.1,16.75 22.1,11.5 21.6,11 P3.0@20.3,11
WS2812B: LED1.1 R1.2@8.095,1.62 U2.13 | length 15
  Bottom Layer w0.25: R1.2@8.095,1.62 8.095,2.195 8.5,2.6 8.5,4.796 9.241,5.536 9.241,7.49 8.731,8 7.9,8 6.8,9.1 6.8,11.1 8.24,12.54 U2.13
pads on no net: C1.0 C2.0 C3.0 C4.0 C5.0 C6.0 C7.0 C8.0 D1.0 LED2.3 P1.4 P2. P3. P4. R1.0 R2.0 R3.0 R4.0 U1.0 U1.4 U2.14 U3.1 U3.2 U3.3 U3.4 U3.5 U3.6 U3.12 U3.13 U3.14

## Polygon pours and split planes (outlines as drawn)
GND_H on Bottom Layer "Bottom Layer-GND" (solid, pour order 14): 0,25.6 0,51 25,51 25,25.6
GND on Bottom Layer "Bottom Layer-GND" (solid, remove dead copper, pour order 8): 25.05,25 25.05,0 0.05,0 0.05,25
PWR_GND on Bottom Layer "PWR_GND_L03_P000" (solid, remove dead copper, pour order 0): 5.7,8.6 0,8.6 0,25 25,25 25,6.6 20.235,6.6 19,18 5.7,18
GND on Component Side "Component Side-GND" (solid, remove dead copper, pour order 16): 0,25 0,0 25,0.151 25,25
GND_H on Component Side "Bottom Layer-GND" (solid, pour order 12): 0,25.6 0,51 25,51 25,25.6
PWR_GND on Component Side "PWR_GND_L01_P002" (solid, remove dead copper, pour order 2): 5.7,8.6 0,8.6 0,25 25,25 25,6.6 19,6.6 19,18 5.7,18
3V3 on Component Side "3V3_L01_P006" (solid, pour order 6): 15.6,1 15.6,2.2 12.82,2.2 11.78,3.4 9.4,3.4 9.4,1
VDD on Component Side "VDD_L01_P004" (solid, pour order 4): 15.2,4.5 14.2,4.5 14.2,3.7 13.9,3.7 13.9,6.8 18.4,6.8 18.4,3.6 15.2,3.6

## Keep-outs
Keep-Out Layer:
  lines w0.254: 2.173,-0.1 22.549,-0.1 ccw(c22.549,2.657) 25.306,2.657 25.3,2.663 25.3,6.3 63.5,6.3 ccw(c63.5,8.8) 66,8.8 ; 2.173,-0.091 cw(c2.173,2.282) -0.2,2.282 -0.2,23.012 -0.2,48.1 cw(c2.3,48.1) 2.3,50.6 22.5,50.6 cw(c22.5,48.1) 25,48.1 25,46.2 28.4,46.2 63.5,46.2 cw(c63.5,43.7) 66,43.7 66,8.8

## Other copper
Component Side:
  pour cut-out: 5.8,8.4 5.8,8.6 7.954,8.6 8.109,8.4
Bottom Layer:
  pour cut-out: 7.9,0.133 7.5,0.133 7.5,1.233 7.9,1.233

## Silkscreen, mask and mechanical layers (free items; w line width, h text height)
Top Overlay:
  region: 18.034,28.1 19.05,28.902 19.05,27.378
  region: 22.82,32.966 23.622,31.95 22.098,31.95
  region: 17.74,32.966 18.542,31.95 17.018,31.95
  region: 12.66,32.966 13.462,31.95 11.938,31.95
  region: 7.58,32.966 8.382,31.95 6.858,31.95
  region: 2.5,32.966 3.302,31.95 1.778,31.95
  region: 18.034,48.42 19.05,49.222 19.05,47.698
  lines w0.254: 0,7.5 1.5,7.5 ; 0,17.5 1.5,17.5 ; 23.5,7.5 25,7.5 ; 23.5,17.5 25,17.5
  text "I2C Splitter" at 0,44.142 h1.2
  text "Magnetic Encoder / Module V3.0A" at 5.75,21.6 h0.9
  text "Harryzhang Modified" at 8.9,20.2 h1.4
Bottom Overlay:
  region: 18.034,48.5 19.05,47.698 19.05,49.222
  region: 2.58,32.966 1.778,31.95 3.302,31.95
  region: 7.66,32.966 6.858,31.95 8.382,31.95
  region: 12.74,32.966 11.938,31.95 13.462,31.95
  region: 17.82,32.966 17.018,31.95 18.542,31.95
  region: 22.9,32.966 22.098,31.95 23.622,31.95
  region: 18.034,28.18 19.05,27.378 19.05,28.902
  lines w0.254: 0,7.5 1.5,7.5 ; 0,17.5 1.5,17.5 ; 23.5,7.5 25,7.5 ; 23.5,17.5 25,17.5
  text "A" at 19.812,45.412 h2
  text "o" at 5.334,41.094 h8
  text "SCL" at 9.398,32.458 h1 r90
  text "SDA" at 11.938,32.458 h1 r90
  text "GND" at 14.478,32.458 h1 r90
  text "VDD" at 17.018,32.458 h1 r90
  text "V3.0A" at 4.7,17.7 h0.9
Mechanical 4:
  circle w0.254: c61.8,10.7 r3
  circle w0.254: c30.8,10.7 r3
  circle w0.254: c30.8,41.7 r3
  circle w0.254: c61.8,41.7 r3
  circle w0.254: c22.5,48.1 r3
  circle w0.254: c22.5,28.1 r3
  circle w0.254: c2.5,28.1 r3
  circle w0.254: c2.5,48.1 r3
  circle w0.254: c22.5,48.1 r1.6
  circle w0.254: c22.5,48.1 r3
  circle w0.254: c22.5,28.1 r3
  circle w0.254: c2.5,28.1 r3
  circle w0.254: c2.5,48.1 r3
  circle w0.254: c22.5,22.5 r3
  circle w0.254: c22.5,2.5 r3
  circle w0.254: c2.5,2.5 r3
  circle w0.254: c2.5,22.5 r3
  circle w0.254: c22.5,22.5 r1.6
  text "All units are in millimetres" at 0,22.6 h1
Mechanical 16:
  drawing of 3748 lines, arcs and shapes, not listed
  text "1" at -86.436,122.755 h1.78
  text "2" at -13.792,122.755 h1.78
  text "3" at 59.36,122.755 h1.78
  text "4" at 132.258,122.755 h1.78
  text "A" at -120.777,99.743 h1.78
  text "A" at 166.243,99.743 h1.78
  text "1" at -84.785,94.869 h1.78
  text "2" at -12.141,94.869 h1.78
  text "3" at 61.011,94.869 h1.78
  text "4" at 133.909,94.869 h1.78
  text "A" at -119.126,71.857 h1.78
  text "A" at 167.894,71.857 h1.78
  text "B" at -120.777,51.686 h1.78
  text "B" at 166.243,51.686 h1.78
  text "B" at -119.126,23.8 h1.78
  text "B" at 167.894,23.8 h1.78
  text "C" at -120.777,3.172 h1.78
  text "C" at 166.243,3.172 h1.78
  text "C" at -119.126,-24.714 h1.78
  text "C" at 167.894,-24.714 h1.78
  text "ENGINEER:" at 51.308,-33.836 h1.14
  text "TITLE:" at 89.408,-33.836 h1.14
  text "PCB DESIGNER:" at 51.308,-41.329 h1.14
  text "D" at -120.777,-44.834 h1.78
  text "D" at 166.243,-44.834 h1.78
  text "DATE:" at 51.308,-49.076 h1.14
  text "PART NO.:" at 89.408,-49.076 h1.14
  text "REV:" at 142.748,-49.076 h1.14
  text "Altium Limited" at 18.288,-51.616 h1.78
  text ".PRINT_DATE" at 52.578,-52.124 h1.78
  text "12a Rodborough Rd" at 18.288,-54.156 h1.78
  text "Frenchs Forest" at 18.288,-56.696 h1.78
  text "FILE NAME:" at 51.308,-56.696 h1.14
  text "DWG NO:" at 89.408,-56.696 h1.14
  text "SCALE:" at 142.748,-56.696 h1.14
  text "NSW 2086" at 18.288,-59.236 h1.78
  text ".PCB_FILE_NAME_NO_PATH" at 52.578,-59.744 h1.78
  text "ENGINEER:" at 52.959,-61.722 h1.14
  text "TITLE:" at 91.059,-61.722 h1.14
  text "1" at -86.436,-65.205 h1.78
  text "2" at -13.792,-65.205 h1.78
  text "3" at 59.36,-65.205 h1.78
  text "4" at 132.258,-65.205 h1.78
  text "PCB DESIGNER:" at 52.959,-69.215 h1.14
  text "D" at -119.126,-72.72 h1.78
  text "D" at 167.894,-72.72 h1.78
  text "DATE:" at 52.959,-76.962 h1.14
  text "PART NO.:" at 91.059,-76.962 h1.14
  text "REV:" at 144.399,-76.962 h1.14
  text "Altium Limited" at 19.939,-79.502 h1.78
  text ".PRINT_DATE" at 54.229,-80.01 h1.78
  text "12a Rodborough Rd" at 19.939,-82.042 h1.78
  text "Frenchs Forest" at 19.939,-84.582 h1.78
  text "FILE NAME:" at 52.959,-84.582 h1.14
  text "DWG NO:" at 91.059,-84.582 h1.14
  text "SCALE:" at 144.399,-84.582 h1.14
  text "NSW 2086" at 19.939,-87.122 h1.78
  text ".PCB_FILE_NAME_NO_PATH" at 54.229,-87.63 h1.78
  text "1" at -84.785,-93.091 h1.78
  text "2" at -12.141,-93.091 h1.78
  text "3" at 61.011,-93.091 h1.78
  text "4" at 133.909,-93.091 h1.78

## Dimensions
2.5,22.5 to 2.5,2.5 on Mechanical 16
2.5,22.5 to 22.5,22.5 on Mechanical 16